# Altium PCB IPMC_MACP.PcbDoc (part 2 of 2)
Units mil, origin at the board's own origin, x right, y up, seen from the top; angles counter-clockwise.
Board outline 3909.92 x 3909.91 mil, 2 copper layers (Top Layer, Bottom Layer); 132 components, 84 nets, 496 pads, 179 vias.
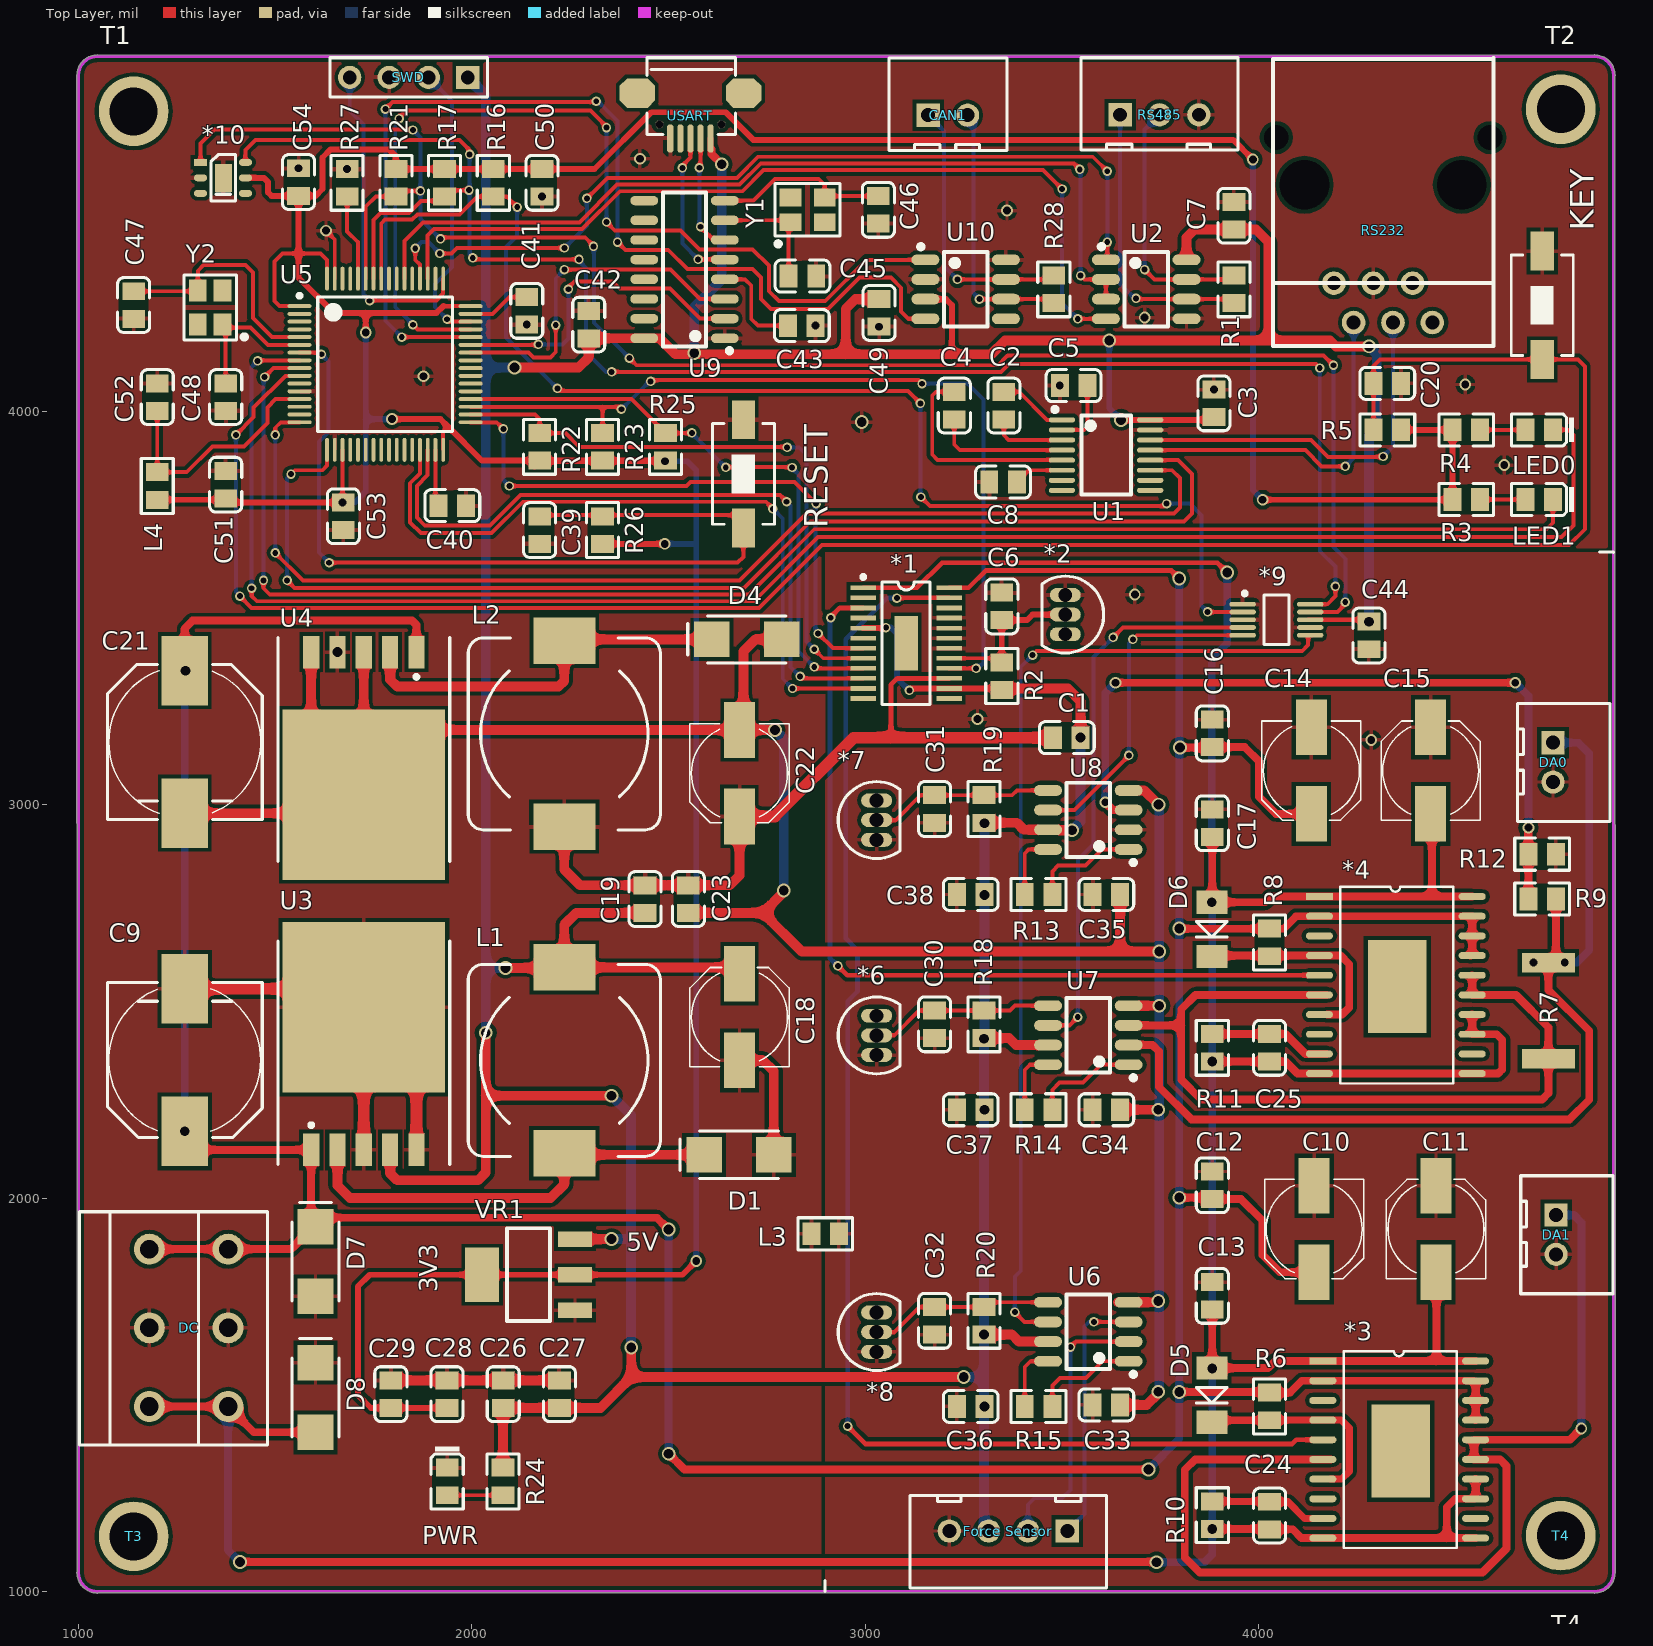
[diagram p0: Top Layer view]

## Via types
v1: diameter 24, hole 15, Top Layer to Bottom Layer, 98 vias
v2: diameter 35, hole 25, Top Layer to Bottom Layer, 48 vias
v3: diameter 30, hole 20, Top Layer to Bottom Layer, 33 vias

## Nets (pads, with @x,y where several pads share a name; then routed paths per layer and width w, separated by ;. In a path a pad name is that pad's centre, name@x,y a point inside that pad or via, vN(x,y) a via of type N, cw(c..) or ccw(c..) an arc to the next point about the centre after c; other vN are vias at no path point) (continued)
pads on no net: *1.2 *1.4 *1.6 *1.12 *1.13 *1.22 *1.25 *2.3 *3. *3.3 *3.8 *3.12 *4. *4.3 *4.8 *4.12 *6.3 *7.3 *8.3 *10.3 *10.4 RS232.1 RS232.2 RS232.6 RS232.7 RS232.8 RS232.9 RS232.10 T1.1 T2.1 T3.1 T4.1 U1.7 U1.8 U1.9 U1.10 U5.2 U5.3 U5.4 U5.11 U5.14 U5.15 U5.20 U5.21 U5.22 U5.23 U5.24 U5.25 U5.26 U5.27 U5.28 U5.37 U5.38 U5.39 U5.40 U5.41 U5.50 U5.53 U5.55 U5.56 U5.61 U5.62 U9.9 U9.10 U9.11 U9.12 U9.13 U9.14 U9.15 U10.5 USART. USART.4 USART.6 USART.7 Y1.2 Y1.4 Y2.2 Y2.4

## Polygon pours and split planes (outlines as drawn)
GND on Top Layer "Top Layer-No Net" (solid, remove dead copper, pour order 38): 995.64,994 995.64,4905 4909.64,4905 4909.64,4904 4909.64,3641 2897.64,3641 2897.64,1000
SGND on Top Layer "Top Layer-No Net" (solid, remove dead copper, pour order 32): 4913.14,1000 2897.64,1000 2897.64,3641 4909.64,3641
GND on Bottom Layer "Top Layer-No Net" (solid, remove dead copper, pour order 36): 995.64,994 995.64,4905 4909.64,4905 4909.64,3641 2897.64,3641 2897.64,1000
SGND on Bottom Layer "Top Layer-No Net" (solid, remove dead copper, pour order 34): 4913.14,1000 2897.64,1000 2897.64,3641 4909.64,3641

## Keep-outs
Keep-Out Layer:
  lines w7.99: 999.84,1047.64 ccw(c1047.64,1047.64) 1047.64,999.84 ; 999.84,4853.94 cw(c1047.64,4853.94) 1047.64,4901.73 4854.72,4901.57 ; 4853.94,999.84 ccw(c4853.94,1047.64) 4901.73,1047.64 ; 4853.94,4901.73 cw(c4853.94,4853.94) 4901.73,4853.94
  lines w8: 999.84,4853.94 1000,1045.67 ; 1042.13,1000 4853.94,1000 ; 4901.57,4857.09 4901.73,1047.64

## Silkscreen, mask and mechanical layers (free items; w line width, h text height)
Top Overlay:
  lines w8: 2897.64,1000 2897.64,1028 ; 4866,3642 4901.62,3641.73
  text "5V" at 2394,1866 h45
  text "3V3" at 1912,1761 h45 r90
Bottom Overlay:
  text "IO" at 1867.45,4684.15 h60 r270
  text "5V" at 1964.57,4674.15 h60 r270
  text "H" at 3189.98,4672.23 h60 r90
  text "L" at 3237.22,4632.24 h60 r270
  text "B" at 3720.47,4629.92 h60 r270
  text "A" at 3622.05,4625.98 h60 r270
  text "CLK" at 1665.35,4614.17 h60 r270
  text "GND" at 1766.4,4614.17 h60 r270
  text "GND" at 3818.9,4511.81 h60 r270
  text "GND" at 4259,4400 h60 r270
  text "KEY" at 4691,4184 h60 r270
  text "RX" at 4205.1,4057.12 h60 r270
  text "TX" at 4307.46,4057.12 h60 r270
  text "LED0" at 4792,3919 h60
  text "LED1" at 4791.95,3746 h60
  text "Vout0" at 4674,3130 h60
  text "SGND" at 4674,3028 h60
  text "Vout1" at 4674,1934 h60
  text "+12V" at 1683.84,1838.58 h60
  text "SGND" at 4674,1826 h60
  text "GND" at 1633.86,1641.73 h60
  text "-12V" at 1683.84,1448.82 h60
  text "SGND" at 3179,1223 h60 r270
  text "5V" at 3279,1223 h60 r270
  text "F-" at 3379,1223 h60 r270
  text "F+" at 3479,1223 h60 r270
  text "JLCJLCJLC" at 2200,1073 h50